# Altium PCB 2SiPM_PCB.PcbDoc (part 2 of 2)
Units mm, origin at the board's own origin, x right, y up, seen from the top; angles counter-clockwise.
Board outline 135.3 x 165.7 mm, 2 copper layers (Top Layer, Bottom Layer); 330 components, 151 nets, 821 pads, 138 vias.
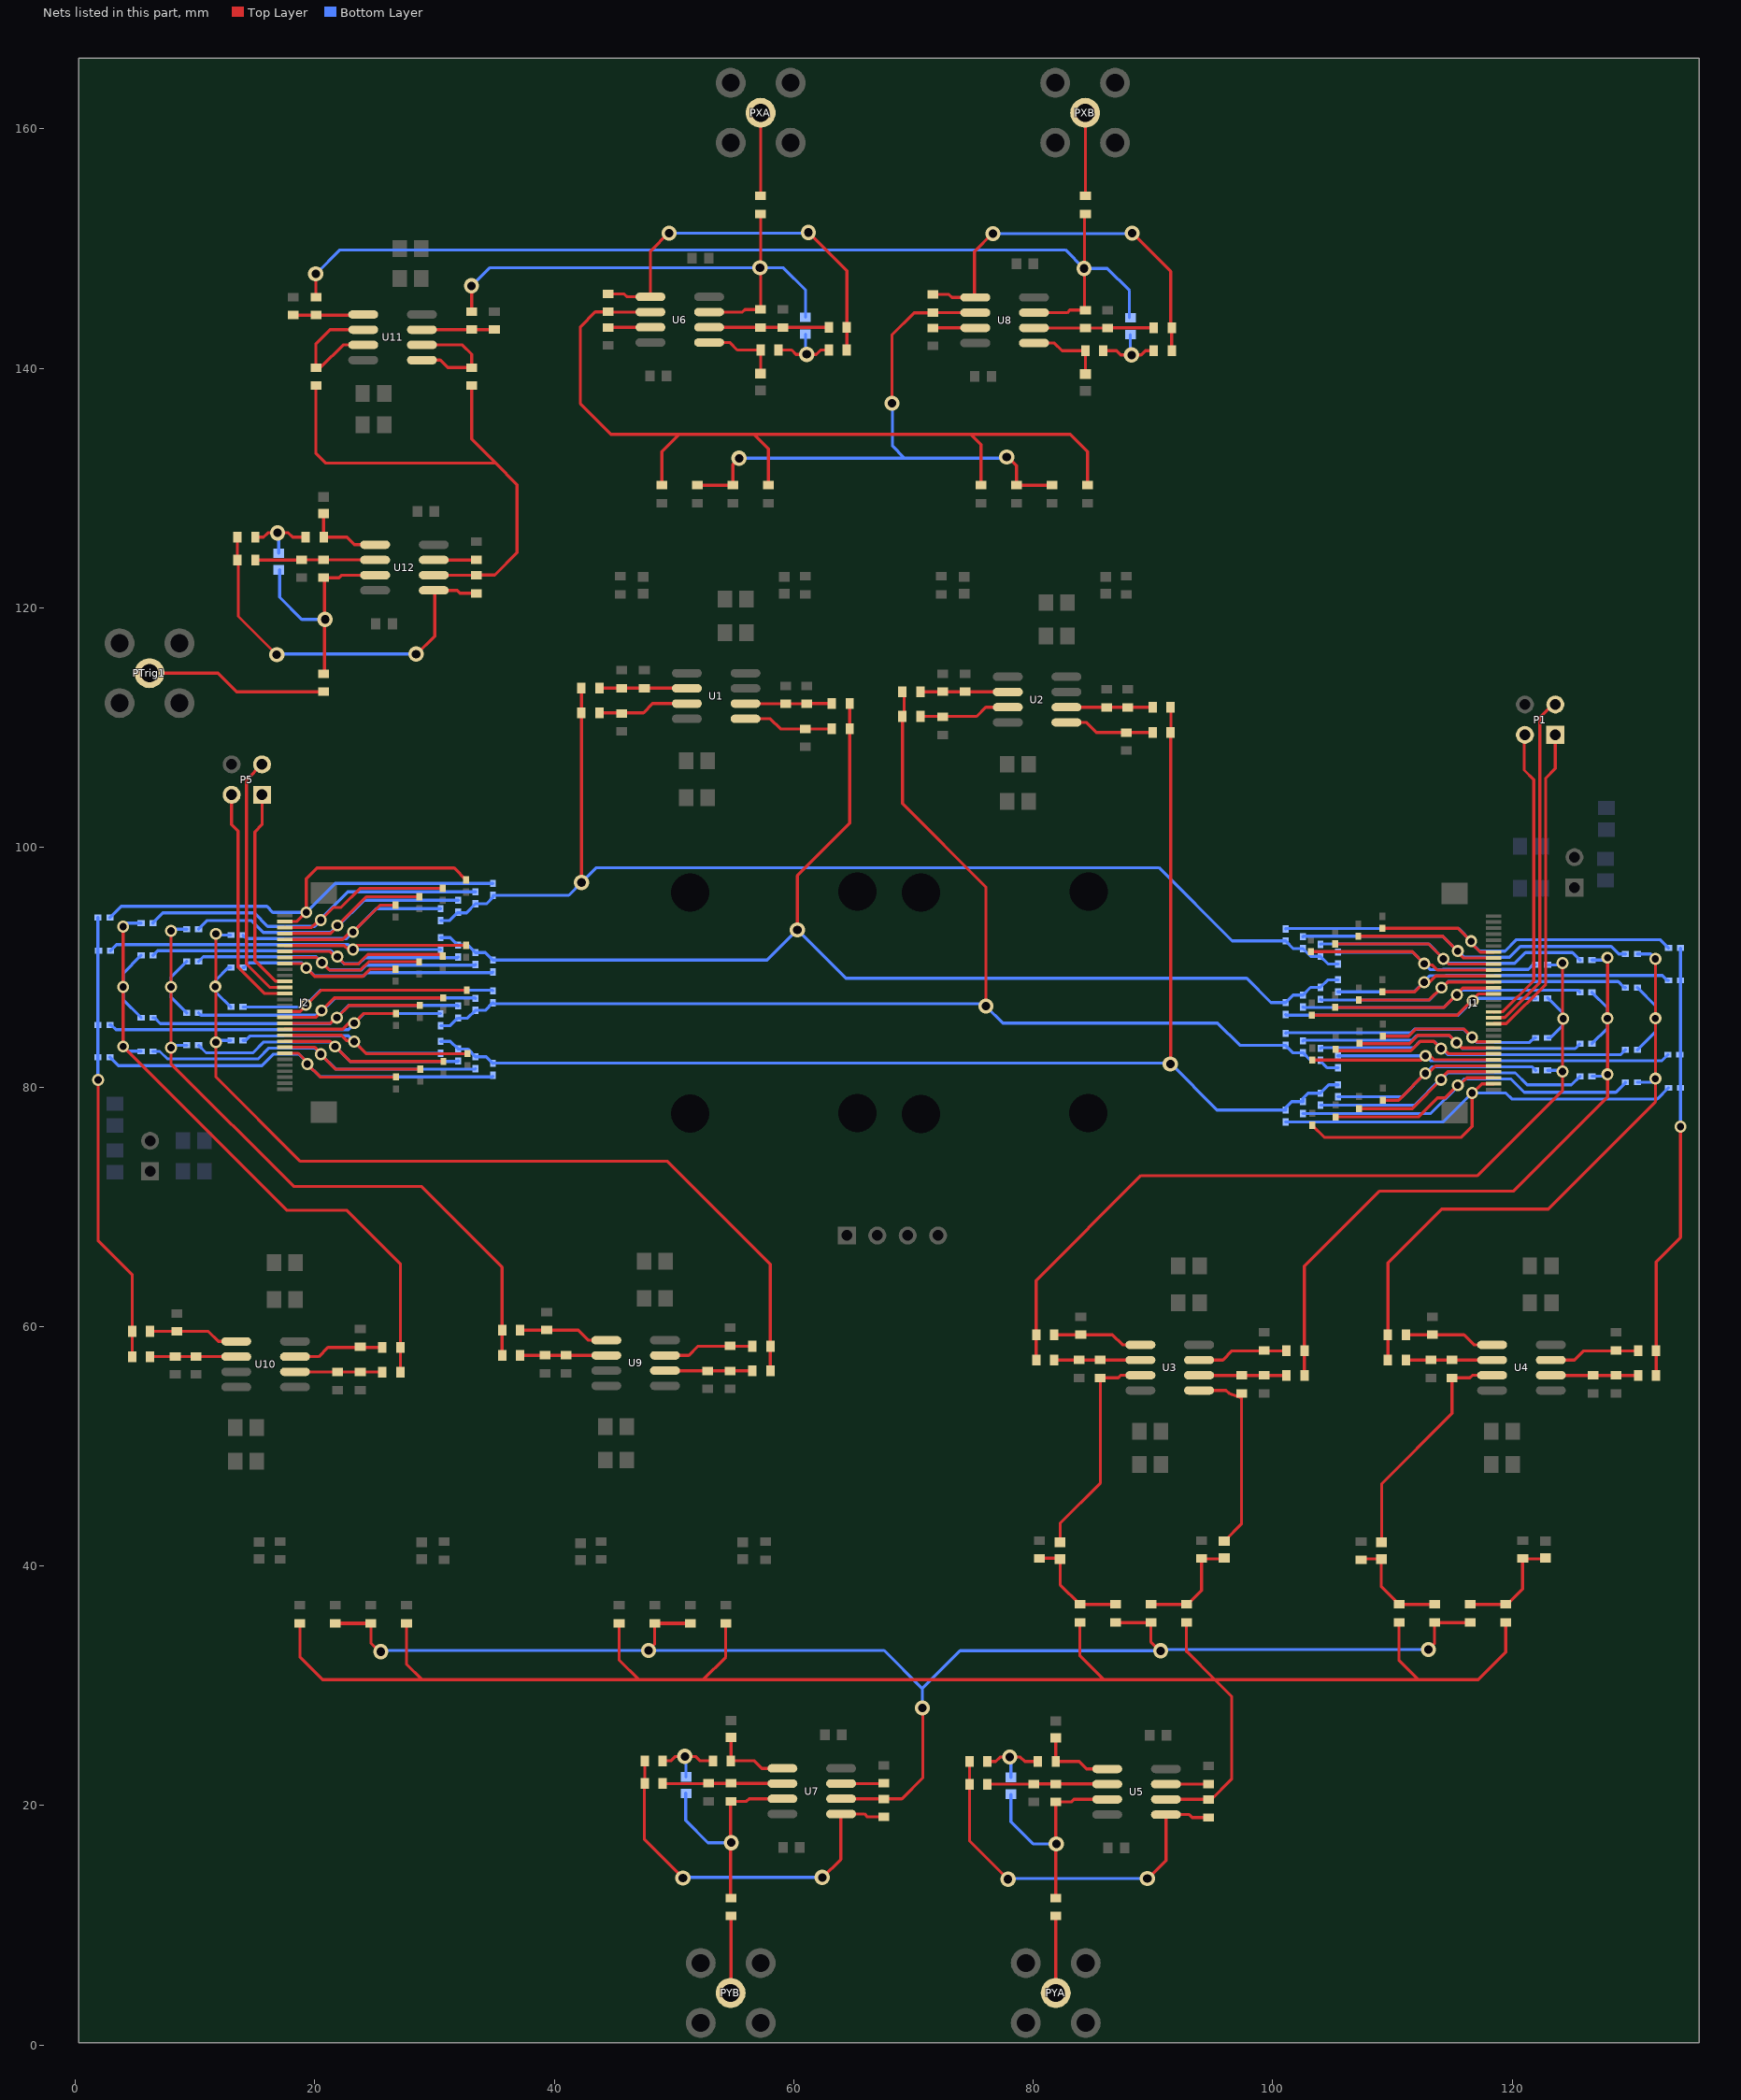
[diagram p2: the nets of this part, all layers, seen from the top]

## Via types
v1: diameter 1.27, hole 0.711, Top Layer to Bottom Layer, 82 vias
v2: diameter 1, hole 0.6, Top Layer to Bottom Layer, 56 vias

## Nets (pads, with @x,y where several pads share a name; then routed paths per layer and width w, separated by ;. In a path a pad name is that pad's centre, name@x,y a point inside that pad or via, vN(x,y) a via of type N, cw(c..) or ccw(c..) an arc to the next point about the centre after c; other vN are vias at no path point) (continued)
NetC5y_2: C5y.2 RY5A.2 RY5B.2 RY5g.2 | length 9.3
  Top Layer w0.254: RY5B.2@116.482,36.798 RY5A.2@119.449,36.798 ; RY5A.2@119.5,36.7 120.864,38.064 RY5g.2@120.864,40.648 ; RY5g.2@120.914,40.598 C5y.2@122.764,40.598
NetC6y_1: C6y.1 R29.1 U4.7 | length 19.6
  Top Layer w0.254: C6y.1@109.1,41.974 109.1,46.867 114.969,52.736 R29.1@114.969,55.715 116.469,55.715 116.684,55.93 U4.7@118.319,55.93
NetC6y_2: C6y.2 RY6A.2 RY6B.2 RY6g.2 | length 9.2
  Top Layer w0.254: RY6g.2@107.314,40.598 109.014,40.598 109.064,40.648 109.064,38.283 RY6A.2@110.549,36.798 RY6B.2@113.516,36.798
NetC7y_1: C7y.1 R3.1 U3.1 | length 16.4
  Top Layer w0.254: U3.1@93.85,54.66 96.1,54.66 96.345,54.415 97.4,54.04 97.4,43.55 ; C7y.1@95.881,42.142 C7y.1@95.949,42.074 97.4,43.525
NetC7y_2: C7y.2 RY7A.2 RY7B.2 RY7g.2 | length 9.3
  Top Layer w0.254: RY7B.2@89.827,36.798 RY7A.2@92.794,36.798 ; RY7A.2@92.8,36.7 94.049,37.949 RY7g.2@94.049,40.648 ; RY7g.2@94.099,40.598 C7y.2@95.949,40.598
NetC8y_1: C8y.1 R23.1 U3.7 | length 18.6
  Top Layer w0.254: C8y.1@82.249,41.974 82.249,43.56 85.6,46.911 R23.1@85.6,55.715 87.1,55.715 87.315,55.93 U3.7@88.95,55.93
NetC8y_2: C8y.2 RY8A.2 RY8B.2 RY8g.2 | length 9.3
  Top Layer w0.254: RY8g.2@80.499,40.598 80.549,40.648 82.249,40.648 82.249,38.443 RY8A.2@83.894,36.798 RY8B.2@86.861,36.798
NetC19_1: C19.1 R48.1 R49.2 | length 6.1
  Top Layer w0.254: R48.1@76.181,23.685 76.866,23.685 77.231,24.05 v1(78.031,24.05) 78.931,24.05 79.296,23.685 R49.2@80.381,23.685
  Bottom Layer w0.254: C19.1@78.131,22.35 v1@78.131,23.95
NetC19_2: C19.2 R44.1 RYA.2 U5.7 | length 19.3
  Top Layer w0.254: RYA.2@81.881,12.25 R44.1@81.881,20.275 ; R44.1@81.881,20.3 83.181,20.3 83.396,20.515 U5.7@86.181,20.515
  Bottom Layer w0.254: C19.2@78.131,20.925 78.131,18.65 79.981,16.8 v1(81.931,16.8)
NetC20_1: C20.1 R49.1 U5.5 | length 6.5
  Top Layer w0.254: C20.1@81.881,25.65 R49.1@81.881,23.685 83.831,23.685 84.461,23.055 U5.5@86.181,23.055
NetC22_1: C22.1 R50.1 R51.2 | length 6.1
  Top Layer w0.254: R51.2@58.735,141.54 59.82,141.54 60.185,141.175 v1(61.085,141.175) 61.885,141.175 62.25,141.54 R50.1@62.935,141.54
  Bottom Layer w0.254: v1@60.985,141.275 C22.1@60.985,142.875
NetC22_2: C22.2 R47.1 R97.1 RXA.2 U6.7 | length 46.1
  Top Layer w0.254: R97.1@33.1,144.75 v1@33.1,146.885 ; U6.7@52.935,144.71 55.72,144.71 55.935,144.925 R47.1@57.235,144.925 RXA.2@57.235,152.95
  Bottom Layer w0.254: v1@33.1,146.9 34.6,148.4 v1(57.185,148.4) 59.135,148.4 60.985,146.55 C22.2@60.985,144.275
  other v1: 33.085,146.9
NetC23_1: C23.1 R51.1 U6.5 | length 6.5
  Top Layer w0.254: U6.5@52.935,142.17 54.655,142.17 55.285,141.54 R51.1@57.235,141.54 C23.1@57.235,139.575
NetC27_1: C27.1 R62.1 R63.2 | length 6.1
  Top Layer w0.254: R62.1@49.056,23.735 49.741,23.735 50.106,24.1 v1(50.906,24.1) 51.806,24.1 52.171,23.735 R63.2@53.256,23.735
  Bottom Layer w0.254: C27.1@51.006,22.4 v1@51.006,24
NetC27_2: C27.2 R58.1 RYB.2 U7.7 | length 19.3
  Top Layer w0.254: RYB.2@54.731,12.35 R58.1@54.731,20.375 ; R58.1@54.756,20.35 56.056,20.35 56.271,20.565 U7.7@59.056,20.565
  Bottom Layer w0.254: C27.2@50.981,21.025 50.981,18.75 52.831,16.9 v1(54.781,16.9)
NetC28_1: C28.1 R63.1 U7.5 | length 6.5
  Top Layer w0.254: C28.1@54.756,25.7 R63.1@54.756,23.735 56.706,23.735 57.336,23.105 U7.5@59.056,23.105
NetC30_1: C30.1 R64.1 R65.2 | length 6.1
  Top Layer w0.254: R65.2@85.86,141.49 86.945,141.49 87.31,141.125 v1(88.21,141.125) 89.01,141.125 89.375,141.49 R64.1@90.06,141.49
  Bottom Layer w0.254: v1@88.11,141.225 C30.1@88.11,142.825
NetC30_2: C30.2 R61.1 R104.1 RXB.2 U8.7 | length 86.8
  Top Layer w0.254: v1(20.085,147.9) 20.085,145.965 R104.1@20.1,145.95 ; U8.7@80.06,144.66 82.845,144.66 83.06,144.875 R61.1@84.285,144.875 ; RXB.2@84.285,152.9 R61.1@84.285,144.875 ; R61.1@84.36,144.875 R61.1@84.285,144.875
  Bottom Layer w0.254: v1@20.1,147.9 22.1,149.9 82.685,149.9 v1(84.235,148.35) 86.185,148.35 88.035,146.5 C30.2@88.035,144.225
NetC31_1: C31.1 R65.1 U8.5 | length 6.5
  Top Layer w0.254: U8.5@80.06,142.12 81.78,142.12 82.41,141.49 R65.1@84.36,141.49 C31.1@84.36,139.525
NetC50_1: C50.1 R100.1 R101.2 | length 6.1
  Top Layer w0.254: R100.1@15.04,125.91 15.725,125.91 16.09,126.275 v1(16.89,126.275) 17.79,126.275 18.155,125.91 R101.2@19.24,125.91
  Bottom Layer w0.254: C50.1@16.99,124.575 v1@16.99,126.175
NetC50_2: C50.2 R96.1 RXB1.2 U12.7 | length 19.3
  Top Layer w0.254: R96.1@20.74,122.525 22.04,122.525 22.255,122.74 U12.7@25.04,122.74 ; RXB1.2@20.815,114.5 R96.1@20.815,122.525
  Bottom Layer w0.254: C50.2@17.065,123.175 17.065,120.9 18.915,119.05 v1(20.865,119.05)
NetC51_1: C51.1 R101.1 U12.5 | length 6.5
  Top Layer w0.254: C51.1@20.74,127.875 R101.1@20.74,125.91 22.69,125.91 23.32,125.28 U12.5@25.04,125.28
NetJ1_7: J1.7 R13g.2 R13x.2 R13y.1 | length 43.8
  Top Layer w0.254: R13g.2@109.15,93.25 115.488,93.25 v2(116.569,92.169) 116.5,92.1 117.331,91.269 J1.7@118.441,91.269
  Bottom Layer w0.254: R13x.2@101.07,93.2 101.107,93.237 115.501,93.237 v2(116.569,92.169) ; v2@116.663,92.05 116.569,92.05 117.279,91.34 119.4,91.34 120.36,92.3 132.35,92.3 R13y.1@133.05,91.6
NetJ1_8: J1.8 R14g.2 R14x.2 R14y.2 | length 40.3
  Top Layer w0.254: R14g.2@107.15,92.6 114.2,92.6 v2(115.45,91.35) ; v2@115.378,91.072 115.628,91.072 115.931,90.769 J1.8@118.441,90.769
  Bottom Layer w0.254: R14x.2@102.527,92.556 102.564,92.594 114.206,92.594 v2(115.45,91.35) 115.968,90.832 119.777,90.832 120.684,91.739 128.262,91.739 128.888,91.113 R14y.2@129.455,91.113
NetJ1_9: J1.9 R15g.2 R15x.2 R15y.2 | length 37
  Top Layer w0.254: R15g.2@105.2,91.95 113,91.95 v2@114.25,90.7 ; v2(114.25,90.704) v2@114.25,90.7 ; J1.9@118.441,90.269 114.681,90.269 114.35,90.6 114.25,90.6 114.2,90.65 v2@114.25,90.7
  Bottom Layer w0.254: R15x.2@103.984,91.913 104.021,91.95 113.004,91.95 v2(114.25,90.704) 114.63,90.324 120.2,90.324 121.107,91.231 125.024,91.231 R15y.2@125.655,90.6
NetJ1_10: J1.10 R16g.2 R16x.2 R16y.2 | length 33.2
  Top Layer w0.254: R16g.2@103.2,91.3 111.65,91.3 v2(112.65,90.3) 112.75,90.2 113.307,90.2 113.738,89.769 J1.10@118.441,89.769
  Bottom Layer w0.254: R16x.2@105.441,91.269 111.681,91.269 v2(112.65,90.3) 113.142,89.808 114.221,89.808 114.229,89.816 121.35,89.816 121.734,90.2 R16y.2@121.95,90.2
NetJ1_11: J1.11 R9g.2 R9x.2 R9y.2 | length 37.7
  Top Layer w0.254: R9g.2@109.15,87.95 111.85,87.95 v2(112.65,88.75) ; 113.15,88.8 113.619,89.269 J1.11@118.441,89.269
  Bottom Layer w0.254: R9x.2@105.441,87.95 111.8,87.95 113.15,89.3 114.432,89.3 114.44,89.308 132.542,89.308 132.95,88.9 R9y.2@133.05,88.9
NetJ1_12: J1.12 R10g.2 R10x.2 R10y.2 | length 38.2
  Top Layer w0.254: R10g.2@107.183,87.269 113.073,87.269 v2(114.1,88.296) 114.146,88.296 114.619,88.769 J1.12@118.441,88.769
  Bottom Layer w0.254: R10x.2@103.984,87.317 104.032,87.269 113.119,87.269 114.65,88.8 128.85,88.8 129.35,88.3 R10y.2@129.45,88.3
NetJ1_13: J1.13 R11g.2 R11x.2 R11y.2 | length 37.7
  Top Layer w0.254: R11g.2@105.217,86.65 105.225,86.642 114.32,86.642 v2(115.378,87.7) ; v2@115.35,87.9 115.493,87.9 115.862,88.269 J1.13@118.441,88.269
  Bottom Layer w0.254: R11x.2@102.527,86.683 102.575,86.636 114.252,86.636 115.707,88.09 125.46,88.09 R11y.2@125.65,87.9
NetJ1_14: J1.14 R12g.2 R12x.2 R12y.2 | length 37.4
  Top Layer w0.254: R12g.2@103.25,86 115.4,86 117.169,87.769 J1.14@118.441,87.769
  Bottom Layer w0.254: R12x.2@101.07,86.05 101.117,86.002 115.493,86.002 v2(116.7,87.209) 116.891,87.4 R12y.2@121.95,87.4
NetJ1_17: J1.17 P1.2 | length 25.4
  Top Layer w0.254: J1.17@118.441,86.269 118.464,86.292 119.226,86.292 121.8,88.866 121.8,105.66 121,106.46 121,109.26 P1.2@120.86,109.4
NetJ1_18: J1.18 P1.3 | length 28.8
  Top Layer w0.254: J1.18@118.441,85.769 118.464,85.792 119.368,85.792 122.3,88.724 122.3,110.84 P1.3@123.4,111.94
NetJ1_19: J1.19 P1.1 | length 27
  Top Layer w0.254: J1.19@118.441,85.269 118.464,85.292 119.511,85.292 122.8,88.581 122.8,105.8 123.6,106.6 123.6,109.2 P1.1@123.4,109.4
NetJ1_22: J1.22 R8g.2 R8x.2 R8y.2 | length 31.6
  Top Layer w0.254: R8g.2@109.2,84.25 111.35,84.25 111.95,84.85 115.95,84.85 v2(116.65,84.15) 117.031,83.769 J1.22@118.441,83.769
  Bottom Layer w0.254: R8x.2@101.07,84.485 101.124,84.539 111.567,84.539 111.844,84.816 115.934,84.816 117.034,83.716 121.443,83.716 121.827,84.1 R8y.2@121.95,84.1
NetJ1_23: J1.23 R7g.2 R7x.2 R7y.2 | length 35.9
  Top Layer w0.254: R7g.2@107.233,83.65 107.26,83.623 111.423,83.623 112.116,84.316 114.734,84.316 v2(115.35,83.7) 115.781,83.269 J1.23@118.441,83.269
  Bottom Layer w0.254: R7x.2@102.527,83.858 102.581,83.912 111.659,83.912 112.055,84.308 114.726,84.308 115.826,83.208 125.258,83.208 R7y.2@125.65,83.6
NetJ1_24: J1.24 R6g.2 R6x.2 R6y.2 | length 40.1
  Top Layer w0.254: R6g.2@105.267,83.15 105.394,83.023 111.523,83.023 112.316,83.816 113.44,83.816 v2(114.055,83.2) ; v2@114.25,83.2 114.681,82.769 J1.24@118.441,82.769
  Bottom Layer w0.254: R6x.2@103.984,83.231 104.038,83.285 111.75,83.285 112.265,83.8 113.5,83.8 114.6,82.7 129.055,82.7 R6y.2@129.455,83.1
NetJ1_25: J1.25 R5g.2 R5x.2 R5y.2 | length 43.6
  Top Layer w0.254: R5g.2@103.3,82.25 112.405,82.25 v2(112.755,82.6) ; v2@113.15,82.6 113.481,82.269 J1.25@118.441,82.269
  Bottom Layer w0.254: R5x.2@105.441,82.604 v2@112.751,82.604 ; 112.15,82.6 v2(112.755,82.6) 113.155,82.2 114.382,82.2 114.39,82.192 132.492,82.192 R5y.2@133,82.7
NetJ1_26: J1.26 R4g.2 R4x.2 R4y.2 | length 28.1
  Top Layer w0.254: R4g.2@109.2,78.9 110.505,78.9 v2(112.75,81.145) 112.995,81.145 113.619,81.769 J1.26@118.441,81.769
  Bottom Layer w0.254: R4x.2@105.441,79.185 110.79,79.185 v2(112.75,81.145) 113.289,81.684 121.666,81.684 R4y.2@121.95,81.4
NetJ1_27: J1.27 R3g.2 R3x.2 R3y.2 | length 36
  Top Layer w0.254: R3g.2@107.2,78.2 111.65,78.2 114.2,80.75 114.2,80.85 114.619,81.269 J1.27@118.441,81.269
  Bottom Layer w0.254: R3x.2@103.984,78.483 111.833,78.483 v2@114.003,80.653 ; v2(114.055,80.6) 114.631,81.176 120.258,81.176 121.249,80.185 124.94,80.185 R3y.2@125.655,80.9
NetJ1_28: J1.28 R2g.2 R2x.2 R2y.2 | length 43.5
  Top Layer w0.254: R2g.2@105.267,77.5 112.168,77.5 113.764,79.096 114.396,79.096 v2(115.45,80.15) ; v2@115.35,80.4 115.85,80.4 116.219,80.769 J1.28@118.441,80.769 J1.28@118.46,80.75
  Bottom Layer w0.254: R2x.2@102.527,77.781 113.177,77.781 v2@115.473,80.077 ; v2(115.45,80.15) 115.968,80.668 119.882,80.668 121,79.55 128.65,79.55 129.455,80.355 R2y.2@129.455,80.4
NetJ1_29: J1.29 R1g.2 R1x.2 R1y.2 | length 52.6
  Top Layer w0.254: R1g.2@103.3,76.8 104.3,75.8 115.75,75.8 116.65,76.7 v2(116.65,79.5) 116.7,79.5 117.469,80.269 J1.29@118.441,80.269
  Bottom Layer w0.254: R1x.2@101.07,77.079 114.229,77.079 v2(116.65,79.5) 119.45,79.5 119.95,79 132.124,79 R1y.2@133.055,79.931
NetJ2_7: J2.7 R13g_1.2 R13x_1.2 R13y_1.1 | length 43.8
  Top Layer w0.254: J2.7@17.509,82.816 18.619,82.816 19.45,81.985 v2(19.381,81.916) 20.462,80.835 R13g_1.2@26.8,80.835
  Bottom Layer w0.254: R13y_1.1@2.9,82.485 3.6,81.785 15.59,81.785 16.55,82.745 18.671,82.745 19.381,82.035 v2@19.287,82.035 ; v2(19.381,81.916) 20.449,80.848 34.843,80.848 R13x_1.2@34.88,80.885
NetJ2_8: J2.8 R14g_1.2 R14x_1.2 R14y_1.2 | length 40.3
  Top Layer w0.254: J2.8@17.509,83.316 20.019,83.316 20.322,83.013 v2@20.572,83.013 ; v2(20.5,82.735) 21.75,81.485 R14g_1.2@28.8,81.485
  Bottom Layer w0.254: R14y_1.2@6.495,82.972 7.062,82.972 7.688,82.346 15.266,82.346 16.173,83.253 19.982,83.253 v2(20.5,82.735) 21.744,81.491 33.386,81.491 R14x_1.2@33.423,81.529
NetJ2_9: J2.9 R15g_1.2 R15x_1.2 R15y_1.2 | length 37
  Top Layer w0.254: J2.9@17.509,83.816 21.269,83.816 21.6,83.485 21.7,83.485 21.75,83.435 v2@21.7,83.385 ; v2(21.7,83.381) v2@21.7,83.385 ; R15g_1.2@30.75,82.135 22.95,82.135 v2@21.7,83.385
  Bottom Layer w0.254: R15y_1.2@10.295,83.485 10.926,82.854 14.843,82.854 15.75,83.761 21.32,83.761 v2(21.7,83.381) 22.946,82.135 31.929,82.135 R15x_1.2@31.966,82.172
NetJ2_10: J2.10 R16g_1.2 R16x_1.2 R16y_1.2 | length 33.2
  Top Layer w0.254: J2.10@17.509,84.316 22.212,84.316 22.643,83.885 23.2,83.885 v2(23.3,83.785) 24.3,82.785 R16g_1.2@32.75,82.785
  Bottom Layer w0.254: R16y_1.2@14,83.885 14.216,83.885 14.6,84.269 21.721,84.269 21.729,84.277 22.808,84.277 v2(23.3,83.785) 24.269,82.816 R16x_1.2@30.509,82.816
NetJ2_11: J2.11 R9g_1.2 R9x_1x.2 R9y_1.2 | length 37.7
  Top Layer w0.254: J2.11@17.509,84.816 22.331,84.816 22.8,85.285 ; v2(23.3,85.335) 24.1,86.135 R9g_1.2@26.8,86.135
  Bottom Layer w0.254: R9y_1.2@2.9,85.185 3,85.185 3.408,84.777 21.51,84.777 21.518,84.785 22.8,84.785 24.15,86.135 R9x_1x.2@30.509,86.135
NetJ2_12: J2.12 R10g_1.2 R10x_1.2 R10y_1.2 | length 38.2
  Top Layer w0.254: J2.12@17.509,85.316 21.331,85.316 21.804,85.789 v2(21.85,85.789) 22.877,86.816 R10g_1.2@28.767,86.816
  Bottom Layer w0.254: R10y_1.2@6.5,85.785 6.6,85.785 7.1,85.285 21.3,85.285 22.831,86.816 31.918,86.816 R10x_1.2@31.966,86.768
NetJ2_13: J2.13 R11g_1.2 R11x_1.2 R11y_1.2 | length 37.7
  Top Layer w0.254: J2.13@17.509,85.816 20.088,85.816 20.457,86.185 v2@20.6,86.185 ; v2(20.572,86.385) 21.63,87.443 30.725,87.443 R11g_1.2@30.733,87.435
  Bottom Layer w0.254: R11y_1.2@10.3,86.185 10.49,85.995 20.243,85.995 21.698,87.449 33.375,87.449 R11x_1.2@33.423,87.402
NetJ2_14: J2.14 R12g_1.2 R12x_1.2 R12y_1.2 | length 37.4
  Top Layer w0.254: J2.14@17.509,86.316 18.781,86.316 20.55,88.085 R12g_1.2@32.7,88.085
  Bottom Layer w0.254: R12y_1.2@14,86.685 19.059,86.685 v2(19.25,86.876) 20.457,88.083 34.833,88.083 R12x_1.2@34.88,88.035
NetJ2_17: J2.17 P5.2 | length 19.4
  Top Layer w0.254: P5.2@13.06,104.4 13.06,101.9 13.6,101.36 13.6,90 15.784,87.816 J2.17@17.509,87.816
NetJ2_18: J2.18 P5.3 | length 21.2
  Top Layer w0.254: P5.3@15.6,106.94 14.3,105.64 14.3,90.269 16.253,88.316 J2.18@17.509,88.316
NetJ2_19: J2.19 P5.1 | length 17.3
  Top Layer w0.254: P5.1@15.6,104.4 15.6,101.9 15,101.3 15,90.563 16.724,88.839 17.486,88.839 J2.19@17.509,88.816
NetJ2_22: J2.22 R8g_1.2 R8x_1.2 R8y_1.2 | length 31.6
  Top Layer w0.254: J2.22@17.509,90.316 18.919,90.316 v2(19.3,89.935) 20,89.235 24,89.235 24.6,89.835 R8g_1.2@26.75,89.835
  Bottom Layer w0.254: R8y_1.2@14,89.985 14.123,89.985 14.507,90.369 18.916,90.369 20.016,89.269 24.106,89.269 24.383,89.546 34.826,89.546 R8x_1.2@34.88,89.6
NetJ2_23: J2.23 R7g_1.2 R7x_1.2 R7y_1.2 | length 35.9
  Top Layer w0.254: J2.23@17.509,90.816 20.169,90.816 v2(20.6,90.385) 21.216,89.769 23.834,89.769 24.527,90.462 28.69,90.462 R7g_1.2@28.717,90.435
  Bottom Layer w0.254: R7y_1.2@10.3,90.485 10.692,90.877 20.124,90.877 21.224,89.777 23.895,89.777 24.291,90.173 33.369,90.173 R7x_1.2@33.423,90.227
NetJ2_24: J2.24 R6g_1.2 R6x_1.2 R6y_1.2 | length 40.1
  Top Layer w0.254: J2.24@17.509,91.316 21.269,91.316 v2@21.7,90.885 ; v2(21.895,90.885) 22.51,90.269 23.634,90.269 24.427,91.062 30.556,91.062 R6g_1.2@30.683,90.935
  Bottom Layer w0.254: R6y_1.2@6.495,90.985 6.895,91.385 21.35,91.385 22.45,90.285 23.685,90.285 24.2,90.8 31.912,90.8 R6x_1.2@31.966,90.854
NetJ2_25: J2.25 R5g_1.2 R5x_1.2 R5y_1.2 | length 43.6
  Top Layer w0.254: J2.25@17.509,91.816 22.469,91.816 v2@22.8,91.485 ; v2(23.195,91.485) 23.545,91.835 R5g_1.2@32.65,91.835
  Bottom Layer w0.254: R5y_1.2@2.95,91.385 3.458,91.893 21.56,91.893 21.568,91.885 22.795,91.885 v2(23.195,91.485) 23.8,91.485 ; v2@23.199,91.481 R5x_1.2@30.509,91.481
NetJ2_26: J2.26 R4g_1.2 R4x_1.2 R4y_1.2 | length 28.1
  Top Layer w0.254: J2.26@17.509,92.316 22.331,92.316 22.955,92.94 v2(23.2,92.94) 25.445,95.185 R4g_1.2@26.75,95.185
  Bottom Layer w0.254: R4y_1.2@14,92.685 14.284,92.401 22.661,92.401 v2(23.2,92.94) 25.16,94.9 R4x_1.2@30.509,94.9
NetJ2_27: J2.27 R3g_1.2 R3x_1.2 R3y_1.2 | length 36
  Top Layer w0.254: J2.27@17.509,92.816 21.331,92.816 21.75,93.235 21.75,93.335 24.3,95.885 R3g_1.2@28.75,95.885
  Bottom Layer w0.254: R3y_1.2@10.295,93.185 11.01,93.9 14.701,93.9 15.692,92.909 21.319,92.909 v2(21.895,93.485) ; v2@21.947,93.432 24.117,95.602 R3x_1.2@31.966,95.602
NetJ2_28: J2.28 R2g_1.2 R2x_1.2 R2y_1.2 | length 43.5
  Top Layer w0.254: J2.28@17.49,93.335 J2.28@17.509,93.316 19.731,93.316 20.1,93.685 v2@20.6,93.685 ; v2(20.5,93.935) 21.554,94.989 22.186,94.989 23.782,96.585 R2g_1.2@30.683,96.585
  Bottom Layer w0.254: R2y_1.2@6.495,93.685 6.495,93.73 7.3,94.535 14.95,94.535 16.068,93.417 19.982,93.417 v2(20.5,93.935) ; v2@20.477,94.008 22.773,96.304 R2x_1.2@33.423,96.304
NetJ2_29: J2.29 R1g_1.2 R1x_1.2 R1y_1.2 | length 52.6
  Top Layer w0.254: J2.29@17.509,93.816 18.481,93.816 19.25,94.585 v2(19.3,94.585) 19.3,97.385 20.2,98.285 31.65,98.285 R1g_1.2@32.65,97.285
  Bottom Layer w0.254: R1y_1.2@2.895,94.154 3.826,95.085 16,95.085 16.5,94.585 v2(19.3,94.585) 21.721,97.006 R1x_1.2@34.88,97.006
NetPTrig1_1: PTrig1.1 RXB1.1 | length 15.2
  Top Layer w0.254: PTrig1.1@6.2,114.555 11.93,114.555 13.485,113 RXB1.1@20.74,113
NetPXA_1: PXA.1 RXA.1 | length 6.9
  Top Layer w0.254: RXA.1@57.235,154.4 PXA.1@57.235,161.35
NetPXB_1: PXB.1 RXB.1 | length 6.9
  Top Layer w0.254: RXB.1@84.36,154.4 PXB.1@84.36,161.325
NetPYA_1: PYA.1 RYA.1 | length 6.4
  Top Layer w0.254: PYA.1@81.881,4.35 RYA.1@81.881,10.775
NetPYB_1: PYB.1 RYB.1 | length 6.4
  Top Layer w0.254: PYB.1@54.756,4.375 RYB.1@54.756,10.775
NetR1_1: R1.1 R2.2 R7.2 U1.2 | length 7.3
  Top Layer w0.254: R7.2@43.775,113.3 51.06,113.3 U1.2@51.075,113.285
NetR1x_1: R1x.1 R2x.1 R3x.1 R4x.1 R13x_1.1 R14x_1.1 R15x_1.1 R16.1 R16x_1.1 R18.1 | length 108.5
  Top Layer w0.254: v1@91.475,81.65 R18.1@91.475,109.6 ; R18.1@91.5,109.6 R16.1@91.5,111.715
  Bottom Layer w0.254: R16x_1.1@30.509,83.816 31.322,83.816 R15x_1.1@31.966,83.172 32.779,83.172 R14x_1.1@33.423,82.529 34.327,82.529 R13x_1.1@34.88,81.975 34.905,82 91.425,82 95.346,78.079 R1x.1@101.07,78.079 101.07,78.257 101.594,78.781 R2x.1@102.527,78.781 102.527,79.052 102.958,79.483 R3x.1@103.984,79.483 104.686,80.185 R4x.1@105.441,80.185
  other v1: 91.45,81.925
NetR1x_1_1: R1x_1.1 R2x_1.1 R3x_1.1 R4x_1.1 R7.1 R9.1 R13x.1 R14x.1 R15x.1 R16x.1 | length 96.4
  Top Layer w0.254: v1(42.275,97.075) R9.1@42.275,111.25 R7.1@42.275,113.3
  Bottom Layer w0.254: R4x_1.1@30.509,93.9 31.264,93.9 31.914,94.55 32.669,94.55 R2x_1.1@33.423,95.304 34.346,95.304 34.88,95.838 R1x_1.1@34.88,96.006 41.206,96.006 v1(42.275,97.075) 43.516,98.316 90.494,98.316 96.61,92.2 R13x.1@101.07,92.2 101.713,91.556 R14x.1@102.527,91.556 103.171,90.913 R15x.1@103.984,90.913 104.628,90.269 R16x.1@105.441,90.269
NetR1y_1: R1y.1 R5y.1 R9y.1 R13y.2 R32.1 R36.1 | length 36.5
  Top Layer w0.254: R32.1@132.019,55.915 R36.1@132.019,57.965 132.019,65.4 134.055,67.436 v2(134.055,76.69)
  Bottom Layer w0.254: v2@134.055,76.7 R1y.1@134.055,79.931 134.055,82.7 134.055,88.9 R13y.2@134.055,91.6
NetR1y_1_1: R1y_1.1 R5y_1.1 R9y_1.1 R13y_1.2 R85.1 R87.1 | length 37.6
  Top Layer w0.254: v2(1.905,80.59) 1.905,67.195 4.75,64.35 R87.1@4.75,59.6 R85.1@4.75,57.485
  Bottom Layer w0.254: R13y_1.2@1.895,82.485 1.895,85.185 1.895,91.385 R1y_1.1@1.895,94.154 ; v2@1.9,80.852 R13y_1.2@1.9,82.485
NetR2y_1: R2y.1 R6y.1 R10y.1 R14y.1 R31.1 R35.1 | length 57.7
  Top Layer w0.254: R31.1@109.619,57.2 R35.1@109.619,59.315 109.619,65.319 114.1,69.8 123,69.8 131.955,78.755 v2(131.955,80.7) v2(131.955,85.731) v2(131.955,90.7)
  Bottom Layer w0.254: R10y.1@130.45,88.3 131.955,86.795 v2(131.955,85.731) 131.955,84.6 R6y.1@130.455,83.1 ; R2y.1@130.455,80.4 131.655,80.4 v2(131.955,80.7) ; R14y.1@130.455,91.1 131.555,91.1 v2(131.955,90.7)
NetR2y_1_1: R2y_1.1 R6y_1.1 R10y_1.1 R14y_1.1 R84.1 R86.1 | length 59.5
  Top Layer w0.254: v2(3.995,93.385) v2(3.995,88.354) v2(3.995,83.385) 17.68,69.7 22.7,69.7 27.15,65.25 R86.1@27.15,58.25 R84.1@27.15,56.2
  Bottom Layer w0.254: v2(3.995,83.385) 4.395,82.985 R14y_1.1@5.495,82.985 ; v2(3.995,93.385) 4.295,93.685 R2y_1.1@5.495,93.685 ; R6y_1.1@5.495,90.985 3.995,89.485 v2(3.995,88.354) 3.995,87.29 R10y_1.1@5.5,85.785
NetR3_2: R3.2 R28.1 R33.2 U3.2 | length 7.3
  Top Layer w0.254: U3.2@93.85,55.93 93.865,55.915 R33.2@101.15,55.915
NetR3y_1: R3y.1 R7y.1 R11y.1 R15y.1 R33.1 R37.1 | length 60.1
  Top Layer w0.254: R33.1@102.65,55.915 R37.1@102.65,57.965 102.65,65.05 108.9,71.3 120.095,71.3 127.955,79.16 v2(127.955,81.05) v2(127.955,90.8)
  Bottom Layer w0.254: R7y.1@126.65,83.6 127.95,84.9 v2(127.95,85.731) 127.95,86.6 R11y.1@126.65,87.9 ; R3y.1@126.655,80.9 127.755,80.9 v2@127.955,81.1 ; R15y.1@126.655,90.6 127.755,90.6 v2(127.955,90.8)
NetR3y_1_1: R3y_1.1 R7y_1.1 R11y_1.1 R15y_1.1 R76.1 R78.1 | length 61.3
  Top Layer w0.254: v2(7.995,93.035) v2(7.995,83.285) 7.995,81.949 18.245,71.7 28.9,71.7 35.65,64.95 R78.1@35.65,59.7 R76.1@35.65,57.585
  Bottom Layer w0.254: v2(7.995,83.285) 8.195,83.485 R15y_1.1@9.295,83.485 ; v2@7.995,92.985 8.195,93.185 R3y_1.1@9.295,93.185 ; R11y_1.1@9.3,86.185 8,87.485 v2(8,88.354) 8,89.185 R7y_1.1@9.3,90.485
NetR4_1: R4.1 R5.2 R6.2 U1.6 | length 7.2
  Top Layer w0.254: U1.6@55.99,112 R5.2@59.325,112 R4.1@61.075,112 61.09,112.015 R6.2@63.175,112.015
NetR4y_1: R4y.1 R8y.1 R12y.1 R16y.1 R27.1 R30.1 | length 75
  Top Layer w0.254: R27.1@80.25,57.2 R30.1@80.25,59.315 80.25,63.85 89,72.6 117.1,72.6 124.205,79.705 v2(124.205,81.3) v2(124.205,90.35)
  Bottom Layer w0.254: R4y.1@122.955,81.4 124.155,81.4 124.205,81.4 v2(124.205,81.3) ; R8y.1@122.955,84.1 123.155,84.1 124.205,85.15 124.205,86.181 R12y.1@122.955,87.431 ; R16y.1@122.955,90.2 124.055,90.2 v2(124.205,90.35)
  other v2: 124.255,85.7
NetR4y_1_1: R4y_1.1 R8y_1.1 R12y_1.1 R16y_1.1 R75.1 R77.1 | length 80.7
  Top Layer w0.254: v2(11.745,92.785) v2(11.745,83.735) 11.745,80.855 18.8,73.8 49.45,73.8 58.05,65.2 58.05,58.65 R77.1@57.9,58.5 ; R75.1@58.05,56.3 R77.1@58.05,58.35
  Bottom Layer w0.254: v2(11.745,83.735) 11.895,83.885 R16y_1.1@12.995,83.885 ; v2(11.745,92.785) 11.745,92.685 11.795,92.685 R4y_1.1@12.995,92.685 ; R12y_1.1@12.995,86.654 11.745,87.904 11.745,88.935 12.795,89.985 R8y_1.1@12.995,89.985
  other v2: 11.695,88.385
NetR5x_1: R5x.1 R6x.1 R7x.1 R8x.1 R9x_1x.1 R10x_1.1 R11x_1.1 R12x_1.1 R17.1 R19.1 | length 107.1
  Top Layer w0.254: R19.1@69.075,110.95 69.075,103.666 76.05,96.691 v1(76.05,86.75) ; R19.1@69.225,110.95 R17.1@69.225,113
  Bottom Layer w0.254: R9x_1x.1@30.509,85.125 31.323,85.125 31.948,85.75 32.771,85.75 R11x_1.1@33.423,86.402 34.247,86.402 R12x_1.1@34.88,87.035 34.965,86.95 75.85,86.95 v1(76.05,86.75) 77.475,85.325 95.4,85.325 97.24,83.485 R8x.1@101.07,83.485 101.07,83.455 101.667,82.858 102.517,82.858 103.144,82.231 103.936,82.231 104.563,81.604 R5x.1@105.441,81.604
NetR5x_1_1: R5x_1.1 R6.1 R6x_1.1 R7x_1.1 R8.1 R8x_1.1 R9x.1 R10x.1 R11x.1 R12x.1 | length 100.8
  Top Layer w0.254: v1(60.3,93.125) 60.3,97.65 64.675,102.025 R8.1@64.675,109.9 R6.1@64.675,112.015
  Bottom Layer w0.254: R5x_1.1@30.509,92.481 31.319,92.481 31.946,91.854 R6x_1.1@31.966,91.854 32.796,91.854 R7x_1.1@33.423,91.227 34.253,91.227 R8x_1.1@34.88,90.6 57.775,90.6 v1(60.3,93.125) 64.35,89.075 97.825,89.075 99.85,87.05 R12x.1@101.07,87.05 101.703,87.683 R11x.1@102.527,87.683 103.16,88.317 R10x.1@103.984,88.317 104.617,88.95 R9x.1@105.441,88.95
NetR8_2: R8.2 R10.2 U1.5 | length 7.6
  Top Layer w0.254: U1.5@55.975,110.745 58.055,110.745 58.9,109.9 R10.2@60.956,109.9 R8.2@63.175,109.9
NetR9_2: R9.2 R11.2 U1.3 | length 7.6
  Top Layer w0.254: R9.2@43.775,111.25 47.45,111.25 48.215,112.015 U1.3@51.075,112.015
NetR12_1: R12.1 R13.2 R17.2 U2.2 | length 7.3
  Top Layer w0.254: R17.2@70.725,113 78.01,113 U2.2@78.025,112.985
NetR14_1: R14.1 R15.2 R16.2 U2.6 | length 7.2
  Top Layer w0.254: U2.6@82.925,111.715 86.275,111.715 R16.2@90.075,111.715
NetR18_2: R18.2 R20.2 U2.5 | length 7.6
  Top Layer w0.254: U2.5@82.925,110.445 84.43,110.445 85.275,109.6 87.906,109.6 R18.2@90.125,109.6
NetR19_2: R19.2 R21.2 U2.3 | length 7.6
  Top Layer w0.254: R19.2@70.725,110.95 75.275,110.95 76.04,111.715 U2.3@78.025,111.715
NetR22_1: R22.1 R23.2 R27.2 U3.6 | length 7.2
  Top Layer w0.254: R27.2@81.8,57.2 85.6,57.2 U3.6@88.95,57.2
NetR24_1: R24.1 R25.2 R32.2 U4.2 | length 7.3
  Top Layer w0.254: U4.2@123.219,55.93 123.234,55.915 R32.2@130.519,55.915
NetR26_1: R26.1 R29.2 R31.2 U4.6 | length 7.2
  Top Layer w0.254: R31.2@111.169,57.2 114.969,57.2 U4.6@118.319,57.2
NetR30_2: R30.2 R34.2 U3.5 | length 7.6
  Top Layer w0.254: R30.2@81.75,59.315 R34.2@83.969,59.315 86.6,59.315 87.445,58.47 U3.5@88.95,58.47
NetR35_2: R35.2 R38.2 U4.5 | length 7.6
  Top Layer w0.254: R35.2@111.119,59.315 R38.2@113.338,59.315 115.969,59.315 116.814,58.47 U4.5@118.319,58.47
NetR36_2: R36.2 R39.2 U4.3 | length 7.6
  Top Layer w0.254: U4.3@123.219,57.2 125.204,57.2 125.969,57.965 R36.2@130.519,57.965
NetR37_2: R37.2 R40.2 U3.3 | length 7.6
  Top Layer w0.254: U3.3@93.85,57.2 95.835,57.2 96.6,57.965 R37.2@101.15,57.965
NetR41_1: R41.1 R46.1 R47.2 U6.6 | length 10
  Top Layer w0.254: U6.6@52.935,143.44 52.95,143.425 R47.2@57.235,143.425 R41.1@59.085,143.425 ; R41.1@59.1,143.44 R46.1@62.935,143.44
NetR42_1: R42.1 R43.2 R48.2 U5.1 | length 32.4
  Top Layer w0.254: R43.2@74.681,21.76 74.681,17.05 v1@77.881,13.85 ; R43.2@74.681,21.785 R48.2@74.681,23.685 ; v1@89.531,13.85 91.081,15.4 U5.1@91.081,19.22 ; U5.1@91.081,19.245 93.031,19.245 93.276,19 R42.1@94.631,19
  Bottom Layer w0.254: v1@77.946,13.9 v1(89.531,13.9)
  other v1: 77.896,13.85
NetR42_2: R42.2 RY1A.1 RY2A.1 RY3A.1 RY4A.1 RY5A.1 RY6A.1 RY7A.1 RY8A.1 U5.2 | length 155.5
  Top Layer w0.254: RY4A.1@18.763,35.2 18.763,32.405 20.668,30.5 95.168,30.5 ; RY3A.1@27.663,35.2 27.663,31.805 28.934,30.534 ; RY2A.1@45.418,35.2 45.418,32.15 47.068,30.5 ; 52.418,30.5 54.318,32.4 RY1A.1@54.318,35.2 ; 83.894,32.5 83.894,32.506 ; RY8A.1@83.894,35.274 83.894,32.506 ; 85.85,30.55 83.894,32.506 ; U5.2@91.081,20.515 94.616,20.515 R42.2@94.631,20.5 ; 92.794,32.85 92.794,32.874 ; RY7A.1@92.794,35.274 92.794,32.874 ; R42.2@94.781,20.425 96.581,22.225 96.581,29.087 95.168,30.5 ; RY6A.1@110.549,35.298 110.549,32.101 112.15,30.5 ; RY5A.1@119.449,35.274 119.449,32.8 117.149,30.5 95.168,30.5 ; 92.794,32.874 95.168,30.5
NetR43_1: R43.1 R44.2 R68.1 U5.6 | length 10
  Top Layer w0.254: R43.1@76.181,21.785 R68.1@80.016,21.785 ; R68.1@80.031,21.8 R44.2@81.881,21.8 86.166,21.8 U5.6@86.181,21.785
NetR45_1: R45.1 R46.2 R50.2 U6.1 | length 32.4
  Top Layer w0.254: R45.1@44.485,146.225 45.84,146.225 46.085,145.98 U6.1@48.035,145.98 48.035,149.8 v1@49.585,151.35 ; v1@61.235,151.35 64.435,148.15 R46.2@64.435,143.44 R50.2@64.435,141.54
  Bottom Layer w0.254: v1(49.585,151.3) v1@61.17,151.3
  other v1: 61.22,151.35
NetR45_2: R45.2 RX1A.1 RX2A.1 RX3A.1 RX4A.1 U6.2 | length 73.8
  Top Layer w0.254: U6.2@48.035,144.71 44.5,144.71 R45.2@44.485,144.725 43.425,144.725 42.185,143.485 42.185,137.05 44.735,134.5 50.435,134.5 ; RX1A.1@48.985,130.25 48.985,133.05 50.435,134.5 ; RX2A.1@57.885,130.25 57.885,133.3 56.685,134.5 ; RX3A.1@75.64,130.25 75.64,133.645 74.785,134.5 ; RX4A.1@84.54,130.25 84.54,133.045 83.085,134.5 74.785,134.5 ; 50.435,134.5 56.685,134.5 ; 56.685,134.5 74.785,134.5
NetR52_1: R52.1 U5.3 | length 3.6
  Top Layer w0.254: U5.3@91.081,21.785 94.616,21.785 R52.1@94.631,21.8
NetR53_1: R53.1 U6.3 | length 3.6
  Top Layer w0.254: R53.1@44.485,143.425 44.5,143.44 U6.3@48.035,143.44
NetR54_1: R54.1 R57.1 R58.2 U7.6 | length 10
  Top Layer w0.254: R57.1@49.056,21.835 R54.1@52.891,21.835 ; R54.1@52.906,21.85 R58.2@54.756,21.85 59.041,21.85 U7.6@59.056,21.835
NetR55_1: R55.1 R60.1 R61.2 U8.6 | length 10
  Top Layer w0.254: U8.6@80.06,143.39 80.075,143.375 R61.2@84.36,143.375 R55.1@86.21,143.375 ; R55.1@86.225,143.39 R60.1@90.06,143.39
NetR56_1: R56.1 R57.2 R62.2 U7.1 | length 32.4
  Top Layer w0.254: R57.2@47.531,21.86 47.531,17.15 v1@50.731,13.95 ; R57.2@47.556,21.835 R62.2@47.556,23.735 ; v1@62.381,13.95 63.931,15.5 U7.1@63.931,19.32 ; U7.1@63.956,19.295 65.906,19.295 66.151,19.05 R56.1@67.506,19.05
  Bottom Layer w0.254: v1@50.796,14 v1(62.381,14)
  other v1: 50.746,13.95
NetR56_2: R56.2 RY1B.1 RY2B.1 RY3B.1 RY4B.1 RY5B.1 RY6B.1 RY7B.1 RY8B.1 U7.2 | length 139.4
  Top Layer w0.254: RY4B.1@21.73,35.2 24.696,35.2 24.696,33.572 v1@25.418,32.85 ; RY4B.1@21.73,35.224 RY3B.1@24.696,35.224 ; v1@47.818,32.9 v1(47.868,32.95) 48.385,33.467 48.385,35.2 RY1B.1@51.351,35.2 ; RY2B.1@48.385,35.224 RY1B.1@51.351,35.224 ; U7.2@63.956,20.565 67.491,20.565 R56.2@67.506,20.55 69.031,20.55 70.781,22.3 v1@70.781,28.2 ; RY8B.1@86.861,35.274 89.827,35.274 89.827,33.646 v1@90.549,32.924 ; RY8B.1@86.861,35.298 RY7B.1@89.827,35.298 ; v1@112.949,32.974 v1(112.999,33.024) 113.516,33.541 113.516,35.274 RY5B.1@116.482,35.274 ; RY6B.1@113.516,35.298 RY5B.1@116.482,35.298
  Bottom Layer w0.254: v1(25.518,32.85) 25.618,32.95 v1(47.868,32.95) 67.55,32.95 70.738,29.762 ; v1(70.738,28.15) 70.738,29.762 ; 74.3,32.924 v1(90.649,32.924) 90.749,33.024 v1(112.999,33.024) ; 74.3,32.924 73.9,32.924 70.738,29.762
NetR59_1: R59.1 R60.2 R64.2 U8.1 | length 32.4
  Top Layer w0.254: R59.1@71.61,146.175 72.965,146.175 73.21,145.93 U8.1@75.16,145.93 ; U8.1@75.085,145.93 75.085,149.75 v1@76.635,151.3 ; v1@88.285,151.3 91.485,148.1 R60.2@91.485,143.39 ; R64.2@91.56,141.49 R60.2@91.56,143.39
  Bottom Layer w0.254: v1(76.635,151.25) v1@88.22,151.25
  other v1: 88.27,151.3
NetR59_2: R59.2 RX1B.1 RX2B.1 RX3B.1 RX4B.1 U8.2 | length 51.8
  Top Layer w0.254: RX1B.1@51.952,130.25 RX2B.1@54.918,130.25 54.918,131.983 v1(55.435,132.5) v1@55.485,132.55 ; v1(68.2,137.1) 68.2,142.79 70.06,144.65 R59.2@71.585,144.65 ; R59.2@71.61,144.675 71.625,144.66 U8.2@75.16,144.66 ; v1@77.885,132.6 78.607,131.878 RX3B.1@78.607,130.25 RX4B.1@81.573,130.25
  Bottom Layer w0.254: v1(55.435,132.5) 77.685,132.5 v1(77.785,132.6) ; v1@68.253,137 68.253,133.507 69.21,132.55
NetR66_1: R66.1 U7.3 | length 3.6
  Top Layer w0.254: U7.3@63.956,21.835 67.491,21.835 R66.1@67.506,21.85
NetR67_1: R67.1 U8.3 | length 3.6
  Top Layer w0.254: R67.1@71.61,143.375 71.625,143.39 U8.3@75.16,143.39
NetR71_1: R71.1 R72.2 R76.2 U9.6 | length 7.2
  Top Layer w0.254: R76.2@37.2,57.585 41,57.585 U9.6@44.35,57.585
NetR73_1: R73.1 R74.2 R75.2 U9.2 | length 7.3
  Top Layer w0.254: U9.2@49.25,56.315 49.265,56.3 R75.2@56.55,56.3
NetR77_2: R77.2 R79.2 U9.3 | length 7.6
  Top Layer w0.254: U9.3@49.25,57.585 51.235,57.585 52,58.35 R77.2@56.55,58.35
NetR78_2: R78.2 R80.2 U9.5 | length 7.6
  Top Layer w0.254: R78.2@37.15,59.7 R80.2@39.369,59.7 42,59.7 42.845,58.855 U9.5@44.35,58.855
NetR81_2: R81.2 R85.2 R92.1 U10.6 | length 7.2
  Top Layer w0.254: R85.2@6.3,57.485 10.1,57.485 U10.6@13.45,57.485
NetR82_1: R82.1 R83.2 R84.2 U10.2 | length 7.3
  Top Layer w0.254: U10.2@18.35,56.215 18.365,56.2 R84.2@25.65,56.2
NetR86_2: R86.2 R88.2 U10.3 | length 7.6
  Top Layer w0.254: U10.3@18.35,57.485 20.335,57.485 21.1,58.25 R86.2@25.65,58.25
NetR87_2: R87.2 R89.2 U10.5 | length 7.6
  Top Layer w0.254: R87.2@6.25,59.6 R89.2@8.469,59.6 11.1,59.6 11.945,58.755 U10.5@13.45,58.755
NetR93_1: R93.1 R95.1 R96.2 U12.6 | length 10
  Top Layer w0.254: R95.1@15.04,124.01 R93.1@18.875,124.01 ; R93.1@18.89,124.025 R96.2@20.74,124.025 25.025,124.025 U12.6@25.04,124.01
NetR94_1: R94.1 R95.2 R100.2 U12.1 | length 32.4
  Top Layer w0.254: R95.2@13.54,124.01 R100.2@13.54,125.91 ; R95.2@13.615,124.01 13.615,119.3 v1@16.815,116.1 ; v1@28.465,116.1 30.015,117.65 U12.1@30.015,121.47 ; U12.1@29.94,121.47 31.89,121.47 32.135,121.225 R94.1@33.49,121.225
  Bottom Layer w0.254: v1@16.88,116.15 v1(28.465,116.15)
  other v1: 16.83,116.1
NetR94_2: R94.2 R99.1 R102.1 U12.2 | length 44.3
  Top Layer w0.254: R102.1@20.1,138.575 20.1,132.9 20.9,132.1 35.1,132.1 ; U12.2@29.94,122.74 33.475,122.74 R94.2@33.49,122.725 ; R99.1@33.1,138.575 33.1,134.1 35.1,132.1 ; R94.2@33.515,122.75 35.04,122.75 36.9,124.61 36.9,130.3 35.1,132.1
NetR97_2: R97.2 R98.2 U11.3 | length 6
  Top Layer w0.254: U11.3@28.95,143.235 R98.2@34.985,143.235
NetR99_2: R99.2 U11.1 U11.2 | length 10
  Top Layer w0.254: U11.1@28.95,140.695 30.48,140.695 31.1,140.075 R99.2@33.1,140.075 33.1,141.19 32.325,141.965 U11.2@28.95,141.965
NetR102_2: R102.2 U11.6 U11.7 | length 11.2
  Top Layer w0.254: U11.7@24.05,141.965 22.375,141.965 20.51,140.1 20.125,140.1 R102.2@20.1,140.075 20.1,142.065 21.27,143.235 U11.6@24.05,143.235
NetR103_1: R103.1 U12.3 | length 3.6
  Top Layer w0.254: U12.3@29.94,124.01 33.475,124.01 R103.1@33.49,124.025
NetR104_2: R104.2 R105.2 U11.5 | length 5.8
  Top Layer w0.254: R105.2@18.2,144.45 R104.2@20.1,144.45 U11.5@23.995,144.45
pads on no net: J1.2 J2.2 P3.3

## Polygon pours and split planes (outlines as drawn)
70_GND on Bottom Layer "70_gnd_bot" (solid, remove dead copper, pour order 5): 119.65,101.8 119.65,94.3 129.15,94.3 129.15,101.8 119.65,101.8
70_GND_2 on Bottom Layer "70_2_gnd_bot" (solid, remove dead copper, pour order 6): 1.5,77.4 11.895,77.4 11.895,71.105 11.9,71.1 1.895,71.1 1.5,71.1 1.5,77.4
GND on Bottom Layer "gnd_bot" (solid, remove dead copper, pour order 8): 0.3,0.2 135.6,0.2 135.6,165.9 0.3,165.9
GND on Top Layer "gnd_top" (solid, remove dead copper, pour order 7): 0.3,0.2 135.6,0.2 135.6,165.9 0.3,165.9

## Other copper
Top Layer:
  text "S11830_2_SiPM" at 93.6,125 h3

## Silkscreen, mask and mechanical layers (free items; w line width, h text height)
Top Overlay:
  lines w0.254: 24.296,77.325 30.9,77.325 33.9,80.325 ; 24.334,96.785 30.919,96.785 33.919,93.785 68.099,93.785 ; 33.904,80.285 68.134,80.285 68.134,93.75 ; 53.834,80.285 53.834,93.769 ; 67.816,80.335 67.816,93.8 102.046,93.8 105.046,96.8 111.65,96.8 ; 67.851,80.3 102.031,80.3 105.031,77.3 111.616,77.3 ; 82.116,80.316 82.116,93.8 ; 51.334,77.785 51.334,96.285 51.384,96.335 70.634,96.335 70.634,77.75 70.599,77.785 51.334,77.785 ; 65.316,77.75 84.566,77.75 84.616,77.8 84.616,96.3 65.351,96.3 65.316,96.335 65.316,77.75
Drill Drawing:
  the board outline again, w0.254

## Text inside footprints (layer, text, board x,y; h text height)
J1: Top Overlay "30" at 119.541,80.869 h0.76 r270; Top Overlay "1" at 118.85,96.15 h0.76 r270
J2: Top Overlay "30" at 16.409,93.216 h0.76 r90; Top Overlay "1" at 17.1,77.935 h0.76 r90
P1: Top Overlay "3" at 125,113.7 h0.76 r90; Top Overlay "4" at 121.5,113.7 h0.76 r90; Top Overlay "2" at 121.568,106.86 h0.76 r90; Top Overlay "1" at 124.108,107.368 h0.76 r90
P5: Top Overlay "3" at 16.1,108.7 h0.76 r90; Top Overlay "4" at 13.54,108.7 h0.76 r90; Top Overlay "2" at 13.568,101.86 h0.76 r90; Top Overlay "1" at 16.108,102.368 h0.76 r90